# Altium PCB LAY-90818_A.brd.PcbDoc (part 4 of 6)
Units mil, origin at the board's own origin, x right, y up, seen from the top; angles counter-clockwise.
Board outline 4645.67 x 2165.35 mil, 4 copper layers (TOP, GND, POWER, BOTTOM), stack 60.45 mil thick; 414 components, 348 nets, 1441 pads, 720 vias.
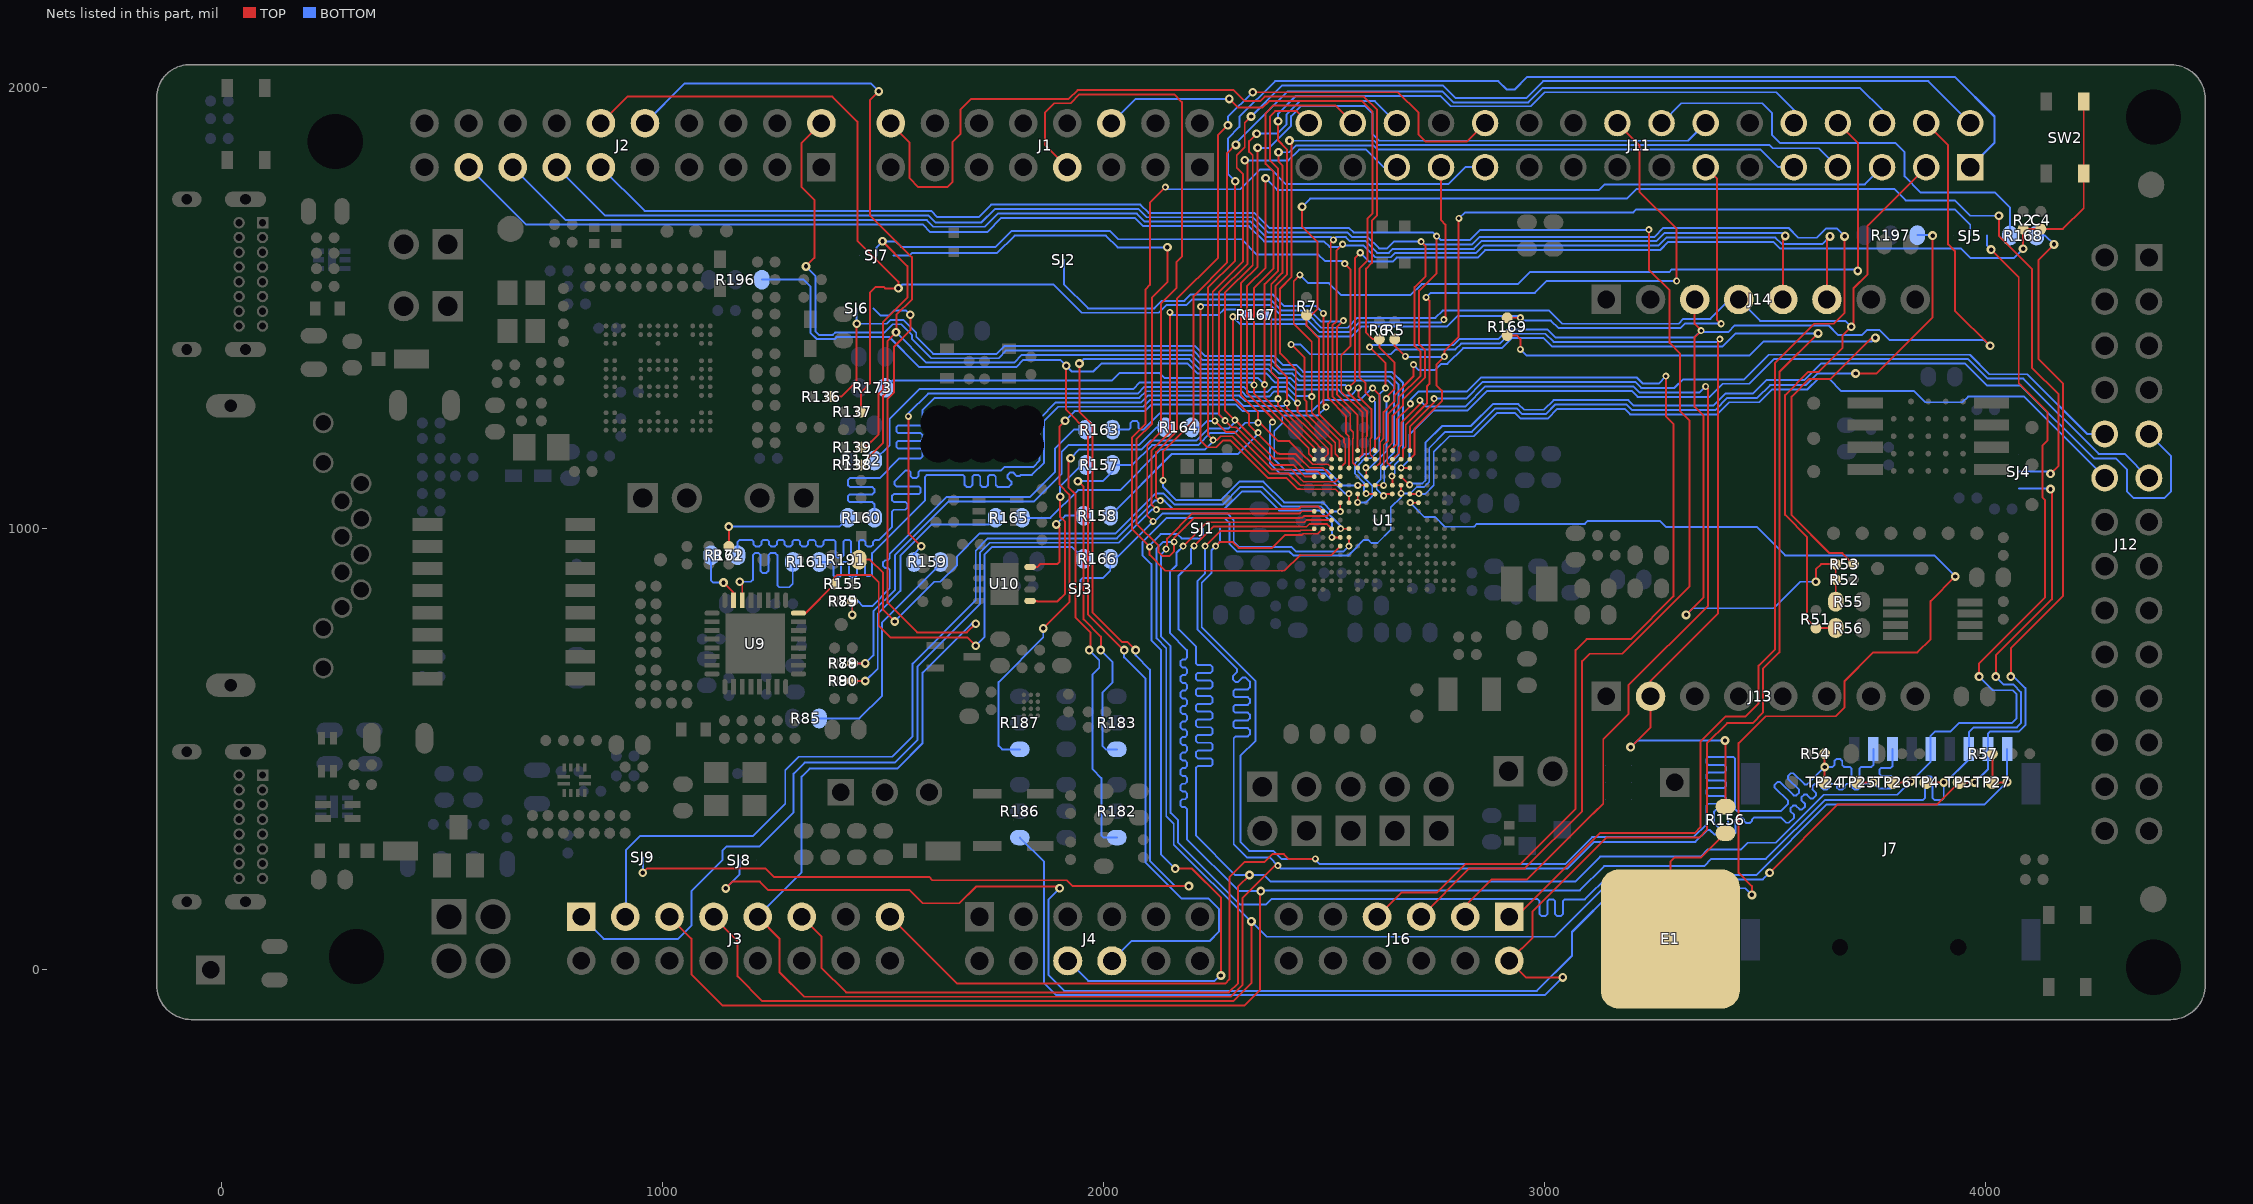
[diagram p6: the nets of this part, all layers, seen from the top]

## Via types
v1: diameter 20, hole 10, TOP to BOTTOM, 483 vias
v2: diameter 16, hole 8, TOP to BOTTOM, 215 vias
v3: diameter 18, hole 8, TOP to BOTTOM, 13 vias
v4: diameter 20, hole 10.1, TOP to BOTTOM, 9 vias

## Nets (pads, with @x,y where several pads share a name; then routed paths per layer and width w, separated by ;. In a path a pad name is that pad's centre, name@x,y a point inside that pad or via, vN(x,y) a via of type N, cw(c..) or ccw(c..) an arc to the next point about the centre after c; other vN are vias at no path point) (continued)
P0_8/FXIO_LCD_RD: J12.11 U1.C12 | length 1973.2
  TOP w4: v2(2674.37,1138.3) 2674.56,1138.11 U1.C12@2694.06,1138.11
  BOTTOM w4.4: v2(2674.37,1138.3) 2694,1157.93 2694,1214 2747.91,1267.9 2824.74,1267.9 2869.83,1313 3196.94,1313 3210.54,1299.4 3374.4,1299.4 3404,1329 3464,1329 3519.7,1384.7 3960.3,1384.7 4004.45,1340.55 4085.56,1340.55 4256.11,1170 4315.24,1170 J12.11@4370,1115.24
P0_9/FXIO_LCD_WR: J12.10 U1.A12 | length 1788.1
  TOP w4.4: U1.A12@2694.06,1177.48 2695,1178.42 2695,1232.17 2749.4,1286.58 v2(2749.4,1295.35)
  BOTTOM w4.4: v2(2749.4,1295.35) 2822.06,1295.35 2859.72,1333 3205.23,1333 3218.83,1319.4 3294.4,1319.4 3314,1339 3452.53,1339 3508.23,1394.7 3964.44,1394.7 4008.59,1350.55 4094.45,1350.55 4229.76,1215.24 J12.10@4270,1215.24
P0_10/CT0_MAT0-ARD_D9: R5.2 SJ5.1 U1.B12 | length 1947.8
  TOP w4: U1.B12@2694.06,1157.8 2705,1168.74 2705,1228.03
  TOP w4.4: R5.2@2660,1430 2660,1414.87 v2(2683.97,1390.89) ; 2705,1228.03 2766.75,1289.78 2766.75,1313.25 2755,1325 2755,1372.82 v2(2772.49,1390.31) 2772.49,1402.8 2805,1435.31 2805,1703.28 v2(2805.53,1703.8)
  BOTTOM w4.4: v2(2683.97,1390.89) 2685.34,1389.52 2771.7,1389.52 v2(2772.49,1390.31) ; v2(2805.53,1703.8) 2819.53,1717.8 3201.26,1717.8 3208.06,1724.6 3930.4,1724.6 3965,1690 SJ5.1@3965,1665
P0_11/EZH_CAMERA_HSYNC: J11.18 U1.B11 | length 1393.7
  TOP w4: U1.B11@2674.37,1157.8 2679,1162.43 2679,1180.57 2685,1186.57 2685,1205
  TOP w4.4: 2685,1205 2685,1236.32 2733.2,1284.52 2733.2,1323.2 2738.8,1328.8 2738.8,1517.6 v2(2731.4,1525) ; J11.18@3165,1920 3215,1870 3215,1764 3299.07,1679.93 v2(3299.07,1561.98)
  BOTTOM w4.4: v2(2731.4,1525) 2741.4,1535 2977.94,1535 3005.14,1562.2 3298.86,1562.2 v2(3299.07,1561.98)
P0_12/FXIO_LCD_CS: J12.9 U1.D11 | length 2251.7
  TOP w4: U1.D11@2674.37,1118.43 2674.37,1118.24 2692.68,1099.93 v2(2694,1099.93)
  BOTTOM w4: v2(2694,1099.93) 2697.07,1103 2723,1103 2730,1110
  BOTTOM w4.4: 2730,1110 2730,1195.86 2767.34,1233.2 2832.46,1233.2 2882.26,1283 2940.62,1283 2953.62,1270 2998.43,1270 3020.42,1291.99 3189.66,1291.99 3202.26,1279.4 3382.69,1279.4 3410.29,1307 3472.86,1307 3503.66,1337.8 3589.51,1337.8 3626.41,1374.7 3953.72,1374.7 4003.43,1325 4080,1325 4245,1160 4295,1160 4320,1135 4320,1085 4335,1070 4405.6,1070 4420,1084.4 4420,1165.24 J12.9@4370,1215.24
P0_13/FXIO_LCD_TE: J12.12 U1.F12 | length 1855.3
  TOP w4: U1.F12@2694.06,1079.06 2713.86,1079.06 v2(2714.74,1079.94)
  BOTTOM w4: v2(2714.74,1079.94) 2715.63,1079.06 2729.06,1079.06 2748.74,1098.74 2748.74,1174.6 2784.14,1210
  BOTTOM w4.4: 2784.14,1210 2839.14,1210 2892.14,1263 2932.33,1263 2945.33,1250 3006.71,1250 3028.7,1271.99 3181.38,1271.99 3193.97,1259.4 3390.97,1259.4 3418.57,1287 3487,1287 3516,1316 3596,1316 3620,1340 3645,1340 3672.5,1312.5 3837.5,1312.5 3863,1287 3947,1287 3960,1300 4087,1300 4270,1117 J12.12@4270,1115.24
P0_14/ADC0_B14-MC_BEMF_B: J4.6 R197.3 U1.E11 | length 3896.3
  TOP w4: v2(2674.37,1080.24) U1.E11@2674.37,1098.74
  TOP w4.4: v1(2162.5,229.67) 2200.33,229.67 2265.79,164.21 v1(2265.79,-12.8) ; v1(3705,1352.2) 3752.2,1352.2 3879.74,1479.74 v1(3879.74,1665)
  BOTTOM w4: 2560.1,944.9 2590.14,974.94 2600.06,974.94 2607.16,967.84 2620.84,967.84 2651,998 2651,1048.57 2674.37,1071.94 v2(2674.37,1080.24) 2695.24,1080.24 2710,1095 2726.31,1095 2733.11,1101.8 2733.4,1101.8 2738.2,1106.6 2738.2,1183.2 2775,1220
  BOTTOM w4.4: J4.6@1918.5,20.5 1919.5,20.5 1965,-25 2251.8,-25 2264,-12.8 v1(2265.79,-12.8) ; v1(2162.5,229.67) 2130,262.17 2130,725.58 2108.2,747.38 2108.2,919.8 2088,940 2088,969.91 2143.09,1025 2274,1025 2285,1014 2285,966.4 2302.8,948.6 2421.4,948.6 2430,940 2555.2,940 2560.1,944.9 ; 2775,1220 2835,1220 2888,1273 2936.48,1273 2949.48,1260 3002.57,1260 3024.56,1281.99 3185.52,1281.99 3198.11,1269.4 3386.83,1269.4 3414.43,1297 3482,1297 3511,1326 3591.86,1326 3618.06,1352.2 v1(3705,1352.2) ; R197.3@3845,1666 3878.74,1666 v1(3879.74,1665)
P0_15/ARD_A4: SJ8.1 U1.G13 | length 5253.6
  TOP w4: v2(2695.24,1059.37) U1.G13@2713.74,1059.37
  TOP w4.4: v1(1143,184.8) 1158.2,200 1220.71,200 1239.98,180.73 1560.27,180.73 1590,151 1673,151 1711,189 1896,189 v1(1900,185) ; v1(3470,170) 3470,190 3440,220 3440,514.14 3500.85,575 3660,575 3680,595 3680,655 3745,720 3845,720 3875,750 3875,836 v1(3931,892)
  BOTTOM w4: v2(2695.24,1059.37) 2695.24,1058.76 2727.13,1026.87 2751.97,1026.87 2773.84,1005 2840,1005
  BOTTOM w4.4: v1(1143,184.8) 1174,215.8 SJ8.1@1174,249 ; v1(1900,185) 1875,160 1875,-12 1910.5,-47.5 2982.5,-47.5 3062,32 3062,85.86 3161.14,185 3455,185 v1(3470,170) ; 2840,1005 2846.2,1011.2 3091.2,1011.2 3098.2,1018.2 3260.94,1018.2 3274.57,1004.57 3480.43,1004.57 3545,940 3883,940 v1(3931,892)
P0_16/PMOD_FC0_SPI_MOSI: J16.3 U1.B10 | length 2322.4
  TOP w4: U1.B10@2654.69,1157.8 2670,1173.11 2670,1185 2675,1190
  TOP w4.4: 2675,1190 2675,1240.46 2717,1282.46 v2(2717,1291.23) ; J16.3@2820,120.5 2820,145 2880,205 2960,205 3110,355 3110.74,355 3132.87,377.13 3132.87,522.87 3190,580 3190,645 3370.4,825.4 3370.4,1317.4 v2(3365,1322.8)
  BOTTOM w4.4: v2(2717,1291.23) 2730.33,1277.9 2820.59,1277.9 2865.69,1323 3201.09,1323 3214.68,1309.4 3351.6,1309.4 v2(3365,1322.8)
P0_17/PMOD_FC0_SPI_CLK: J16.7 U1.A10 | length 2434.8
  TOP w4: U1.A10@2654.69,1177.48 2654.69,1181.95 2665,1192.26
  TOP w4.4: J16.7@2620,120.5 2648.28,148.78 2648.78,148.78 2675,175 2755,175 2820,240 2945,240 3070,365 3070,725 3095,750 3195,750 3291.8,846.8 3291.8,1238.2 3275,1255 v2(3275,1346.14) ; 2665,1192.26 2665,1248 2695.34,1278.34 v2(2695.34,1283.71)
  BOTTOM w4.4: v2(2695.34,1283.71) 2695.34,1292.48 2714.4,1311.55 2824.12,1311.55 2855.57,1343 3209.37,1343 3222.97,1329.4 3258.26,1329.4 v2(3275,1346.14)
P0_18/PMOD_FC0_SPI_MISO: J2.11 J16.5 U1.C10 | length 5030.8
  TOP w4: U1.C10@2654.69,1138.11 2643,1149.8 2643,1182.99 2655,1194.99 2655,1235
  TOP w4.4: 2655,1235 2655,1256.52 2679.14,1280.65 2679.14,1293.85 2728.8,1343.51 2728.8,1405.34 2715.2,1418.94 2715.2,1540.2 2755,1580 v2(2755,1663.8) ; J16.5@2720,120.5 2829.5,230 2955,230 3085,360 3085,700 3101.72,716.72 3175.86,716.72 3328.2,869.05 3328.2,1245.94 3306.8,1267.34 3306.8,1398.2 3283.34,1421.66 3283.34,1540.66 3236.4,1587.6 v2(3236.4,1678.4)
  BOTTOM w4.4: J2.11@860,1820 959,1721 1609,1721 1623.2,1706.8 1716.8,1706.8 1745,1735 2083.43,1735 2101.83,1716.6 2341.82,1716.6 2376.37,1682.06 2556.84,1682.06 2566.69,1672.2 2746.6,1672.2 v2(2755,1663.8) 2763.8,1655 2831.2,1655 2854,1677.8 3235.8,1677.8 v2(3236.4,1678.4)
P0_19/PMOD_FC0_SPI_CS: J2.13 J16.1 U1.C9 | length 5683.9
  TOP w4: U1.C9@2635,1138.11 2635,1190 2645,1200
  TOP w4.4: 2645,1200 2645,1260.66 2669.14,1284.8 2669.14,1297.99 2718.8,1347.66 2718.8,1401.2 2705.2,1414.8 2705.2,1548.15 2730,1572.94 2730,1641.2 v2(2720,1651.2) ; J16.1@2920,120.5 2935.5,120.5 3125,310 3340,310 3353.2,323.2 3353.2,517.2 3410.57,574.57 3455.43,574.57 3485,604.14 3485,690 3522.46,727.46 3522.46,1376.4 3611.06,1465 3655,1465 3680,1490 v1(3680,1663)
  BOTTOM w4.4: J2.13@760,1820 869.82,1710.18 1603.1,1710.18 1618.29,1695 1723,1695 1753,1725 2079.28,1725 2097.68,1706.6 2337.68,1706.6 2372.22,1672.06 2552.69,1672.06 2562.55,1662.2 2598.06,1662.2 2624.46,1635.8 2642.66,1635.8 2658.06,1651.2 v2(2720,1651.2) 2720,1650.4 2725.4,1645 2835.34,1645 2852.54,1662.2 3249.09,1662.2 3269.4,1682.51 3552.91,1682.51 3575.41,1660 3617,1660 3638.2,1681.2 3661.8,1681.2 v1(3680,1663)
P0_20/PMOD_INT: J16.2 R186.3 U1.C8 | length 4805.9
  TOP w4: U1.C8@2615.31,1138.11 2626.99,1149.79 2626.99,1186.99 2627,1197 2635,1205
  TOP w4.4: 2635,1205 2635,1264.8 2659.14,1288.94 2659.14,1302.14 2702.6,1345.6 v2(2702.6,1372.27) ; v1(3041,-17) 2957.5,-17 J16.2@2920,20.5 2948.28,48.78 2948.78,48.78 2972,72 2972,132 3140,300 3350,300 3367.77,317.77 3367.77,513.77 3413.64,559.64 3471.36,559.64 3495,583.29 3495,682.5 3532.46,719.96 3532.46,1355.66 v1(3620,1443.2)
  BOTTOM w4.4: R186.3@1810,300 1865,245 1865,-30 1892.5,-57.5 3000.5,-57.5 v1(3041,-17) ; v2(2702.6,1372.27) 2714.87,1360 2751.06,1360 2765.17,1374.11 2779.2,1374.11 2815.09,1410 2902.68,1410 2925.08,1432.4 2997.6,1432.4 3016.2,1413.8 3403.8,1413.8 3433.2,1443.2 v1(3620,1443.2)
P0_21/TSI0_CH16: R187.3 U1.A8 | length 1761.3
  TOP w4: U1.A8@2615.31,1177.48 2615.31,1200.31 2620,1205
  TOP w4.4: v1(1863,774.2) 1922.5,833.7 1922.5,1077.44 1900,1099.94 1900,1232.5 v1(1912.5,1245) ; v2(2610,1319) 2625,1304 2625,1210 2620,1205
  BOTTOM w4.4: R187.3@1810,500 1770,500 1762,508 1762,652.65 1863,753.65 v1(1863,774.2) ; v1(1912.5,1245) 1934.3,1266.8 2093.51,1266.8 2108.71,1282 2299.71,1282 2314.37,1267.35 2472.86,1267.35 2497.5,1291.99 2580.86,1291.99 2607.88,1319 v2(2610,1319)
P0_22/ADC0_A14-MC_BEMF_C: J4.8 R196.3 U1.B8 | length 3475.9
  TOP w4: 2607,1207 2604.61,1204.61 2604.61,1173.05 2604.65,1168.46 U1.B8@2615.31,1157.8
  TOP w4.4: v1(1915,1370) 1915,1270 1964.42,1220.58 1964.42,806.32 2045.74,725 v1(2046.52,725) ; v2(2577.6,1319.42) 2577.6,1300.69 2607,1271.29 2607,1207
  BOTTOM w4.4: R196.3@1225,1565 1320,1565 1335,1550 1335,1445 1350,1430 1390,1430 1395,1435 1514.08,1435 1582.28,1366.8 1801.8,1366.8 1818.2,1383.2 1901.8,1383.2 v1(1915,1370) 1928.2,1356.8 1976.8,1356.8 1994.68,1374.68 2190.37,1374.68 2212.64,1352.4 2368.86,1352.4 2389.48,1331.78 2419.84,1331.78 2435.68,1315.93 2532.07,1315.93 2546.01,1301.99 2560.16,1301.99 v2(2577.6,1319.42) ; J4.8@2018.5,20.5 2063,65 2240,65 2262,87 2262,137 2237,162 2176.15,162 2095,243.14 2095,660 2046.52,708.48 v1(2046.52,725)
P0_23/ARD_A5: C4.1 R2.2 SJ9.1 SW2.3 SW2.4 U1.B7 | length 5743.2
  TOP w4: U1.B7@2595.63,1157.8 2595.63,1208.63 2597,1210
  TOP w4.4: v1(955,220) 965,230 1233.14,230 1252.41,210.73 1604.27,210.73 1611.8,203.2 1916.8,203.2 1930,190 v1(2193.26,190) ; v1(1945,1375) 1945,1265 1974.42,1235.58 1974.42,810.46 2041.68,743.2 2054.32,743.2 v1(2072.51,725) ; v2(2581.8,1626) 2570,1614.2 2570,1335 2555,1320 v2(2555,1319.73) 2555,1309.14 2597,1267.14 2597,1210 ; v1(4085,1635) R2.2@4085,1680 C4.1@4125,1680 4175,1680 4222.32,1727.32 SW2.3@4222.32,1805.67 SW2.4@4222.32,1969.06
  BOTTOM w4.4: v1(955,220) SJ9.1@955,255 ; v1(1945,1375) 1954.68,1384.68 2194.51,1384.68 2216.79,1362.4 2373,1362.4 2393.62,1341.78 2423.98,1341.78 2439.83,1325.93 2548.8,1325.93 v2(2555,1319.73) ; v1(2072.51,725) 2072.51,713.14 2105,680.66 2105,247.29 2162.29,190 v1(2193.26,190) ; v2(2581.8,1626) 2602,1605.8 2655.09,1605.8 2664.28,1615 2847.77,1615 2864.97,1632.2 3261.52,1632.2 3279.9,1650.58 3518.84,1650.58 3533.32,1636.11 3943.89,1636.11 3966,1614 4064,1614 v1(4085,1635)
P0_24/FC1_SPI_SDO-ARD_D11: R139.2 SJ7.1 U1.B6 | length 2158.2
  TOP w4: U1.B6@2575.94,1157.8 2587,1168.86 2587,1210
  TOP w4.4: R139.2@1450,1185 1460,1185 1489.7,1214.7 1489.7,1306.41 1500,1316.71 1500,1469.16 1555,1524.16 1555,1595.51 v1(1498.52,1651.98) ; v2(2546.63,1601.2) 2560,1587.83 2560,1415 2538.8,1393.8 2538.8,1311.2 2587,1263 2587,1210
  BOTTOM w4.4: SJ7.1@1485,1620 1485,1638.46 v1(1498.52,1651.98) 1528.01,1651.98 1540.6,1639.4 1755.25,1639.4 1790.86,1675 2015,1675 2033.4,1656.6 2312.79,1656.6 2347.33,1622.06 2487.05,1622.06 2501.71,1607.4 2540.43,1607.4 v2(2546.63,1601.2)
P0_25/FCI_SPI_SCK-ARD_D13: J2.12 R137.2 U1.A6 | length 2790
  TOP w4.4: J2.12@860,1920 920,1980 1385,1980 1441.4,1923.6 1441.4,1653.6 1534.55,1560.45 v1(1534.55,1545.4) 1504.6,1545.4 1501.4,1548.6 1482.86,1548.6 1470,1535.74 1470,1330 1450,1310 R137.2@1450,1265 ; v2(2543.8,1472.13) 2528.8,1457.13 2528.8,1305.18 2575.94,1258.04 U1.A6@2575.94,1177.48
  BOTTOM w4.4: v1(1534.55,1545.4) 1542.75,1553.6 1886.4,1553.6 1950,1490 2125,1490 2142.08,1507.08 2187.08,1507.08 2200,1520 2379.14,1520 2404.14,1495 2468.76,1495 2493.76,1470 2541.67,1470 v2(2543.8,1472.13)
P0_26/FC1_SPI_SDI-ARD_D12: J2.10 R138.2 U1.F10 | length 3004.8
  TOP w4: v2(2635,1075) 2639.06,1079.06 U1.F10@2654.69,1079.06
  TOP w4.4: R138.2@1450,1145 1499.7,1194.7 1499.7,1302.27 1510,1312.57 1510,1426.5 v1(1529.24,1445.74) 1530,1446.5 1530,1485.02 1565,1520.02 1565,1616.06 1470,1711.06 1470,1971.8 v1(1490,1991.8)
  BOTTOM w4: v2(2635,1075) 2634,1075 2619,1090 2619,1103 2628.23,1112.23 2628.23,1143.23 2658.8,1173.8
  BOTTOM w4.4: J2.10@960,1920 1050,2010 1471.8,2010 v1(1490,1991.8) ; v1(1529.24,1445.74) 1598.18,1376.8 1796.8,1376.8 1814.68,1394.68 2198.65,1394.68 2220.93,1372.4 2377.14,1372.4 2397.76,1351.78 2428.12,1351.78 2443.97,1335.93 2645.31,1335.93 2658.8,1322.43 2658.8,1173.8
P0_27/FC1_SPI_PCS-ARD_D10: R136.2 SJ6.1 U1.E10 | length 1804.9
  TOP w4: v2(2653.47,1119.46) 2654.69,1118.24 U1.E10@2654.69,1098.74
  TOP w4.4: R136.2@1380,1300 1405,1300 1440.05,1335.05 v1(1440.05,1465)
  BOTTOM w4: v2(2653.47,1119.46) 2660,1125.98 2660,1145 2678.8,1163.8
  BOTTOM w4.4: SJ6.1@1440,1500 v1(1440.05,1465) v1(1440.05,1465) 1508.61,1465 1517.56,1473.94 1546.06,1473.94 1575,1445 1575,1435.07 1613.27,1396.8 1757.66,1396.8 1775.54,1414.68 2206.94,1414.68 2229.22,1392.4 2385.43,1392.4 2406.05,1371.78 2436.41,1371.78 2452.26,1355.93 2653.59,1355.93 2678.8,1330.72 2678.8,1163.8
P0_28/ARD_D8: J2.2 U1.E8 | length 2193.9
  TOP w4: U1.E8@2615.31,1098.74 v2(2635,1098.74)
  TOP w4.4: v1(1325,1595) 1344.2,1614.2 1344.2,1745.8 1315,1775 1315,1875 J2.2@1360,1920
  BOTTOM w4: v2(2635,1098.74) 2636.23,1099.97 2636.23,1134.91 2668.8,1167.49
  BOTTOM w4.4: v1(1325,1595) 1347.07,1572.93 1347.07,1447.07 1354.14,1440 1385.86,1440 1390.86,1445 1502.76,1445 1521.7,1463.94 1541.06,1463.94 1565,1440 1565,1430.92 1609.12,1386.8 1761.8,1386.8 1779.68,1404.68 2202.8,1404.68 2225.07,1382.4 2381.29,1382.4 2401.91,1361.78 2432.27,1361.78 2448.11,1345.93 2649.45,1345.93 2668.8,1326.58 2668.8,1167.49
P0_29/ARD_D2: J1.6 U1.F8 | length 1587.4
  TOP w4: v2(2595,1080) 2596,1080 2596.94,1079.06 U1.F8@2615.31,1079.06
  TOP w4.4: v1(2285,1975) 2305,1955 2360,1955 2375,1970 2585.86,1970 2610,1945.86 2610,1715.22 2598,1703.22 2598,1608 2580,1590 2580,1344 2593.8,1330.2 2593.8,1309.01 v2(2608.8,1294.01)
  BOTTOM w4: v2(2595,1080) 2590.13,1084.87 2590.13,1104.87 2570,1125 2570,1148.84 2590.58,1169.42 2599.42,1169.42 2615,1185
  BOTTOM w4.4: J1.6@2017.5,1920 2072.5,1975 v1(2285,1975) ; v2(2608.8,1294.01) 2615,1287.81 2615,1185
P0_30/ARD_D4: SJ2.1 U1.E7 | length 1356.6
  TOP w4: v2(2576.13,1098.74) U1.E7@2595.63,1098.74
  TOP w4.4: v2(2498.02,1488.65) 2498.8,1487.88 2498.8,1280.19 2503.2,1275.79 v2(2504.21,1275.79)
  BOTTOM w4.4: SJ2.1@1910,1610 1910,1555 1965,1500 2115,1500 2132.08,1517.08 2182.93,1517.08 2196.86,1531 2384,1531 2410,1505 2481.67,1505 v2(2498.02,1488.65) ; v2(2504.21,1275.79) 2485.77,1257.35 2409.4,1257.35 2405,1252.95 2405,1239.61 2386.8,1221.41 2386.8,1158.2 2411.6,1133.4 2506.48,1133.4 2541.14,1098.74 v2(2576.13,1098.74)
P0_31/ARD_D7: J1.16 R6.2 U1.D7 | length 2324.5
  TOP w4: v2(2594.44,1138.56) 2595.63,1137.37 U1.D7@2595.63,1118.43
  TOP w4.4: J1.16@1517.5,1920 1517.5,1917.5 1560,1875 1560,1795 1580,1775 1645,1775 1657.5,1787.5 1657.5,1877.5 1675,1895 1675,1950 1700,1975 1920.86,1975 1940.86,1995 2295,1995 2320,1970 2355,1970 2365,1980 2590,1980 2620,1950 2620,1711.08 2608,1699.08 2608,1603 2595,1590 2595,1445 2610,1430 R6.2@2625,1430 2625,1412 2660,1377 2660,1317.14 2641.29,1298.43 v2(2641.29,1295)
  BOTTOM w4: v2(2594.44,1138.56) 2603.56,1138.56
  BOTTOM w4.4: 2603.56,1138.56 2641.29,1176.29 v2(2641.29,1295)
P1_0/FC3_I2C_SDA: J2.17 J14.6 U1.C6 | length 3921.8
  TOP w4: 2565.94,1219.06 2565.94,1205.54 2565,1204.6 2565,1150 2575.94,1139.06 U1.C6@2575.94,1138.11
  TOP w4.4: v2(2541.95,1645.37) 2527.6,1631.01 2527.6,1470.07 2518.8,1461.27 2518.8,1301.04 2559.22,1260.62 2559.22,1225.78 2565.94,1219.06 ; J14.6@3640.04,1520.11 3640.04,1656.04 v1(3647,1663)
  BOTTOM w4.4: J2.17@560,1820 689.82,1690.18 1589.82,1690.18 1607,1673 1736.17,1673 1768.17,1705 2071,1705 2089.4,1686.6 2329.39,1686.6 2363.94,1652.06 2499.48,1652.06 2512.37,1639.17 2535.75,1639.17 v2(2541.95,1645.37) 2545.12,1642.2 2589.77,1642.2 2616.17,1615.8 2650.94,1615.8 2660.14,1625 2843.63,1625 2860.83,1642.2 3257.38,1642.2 3275.76,1660.58 3523.27,1660.58 3537.75,1646.11 3630.11,1646.11 v1(3647,1663)
P1_1/FC3_I2C_SCL: J2.15 J14.5 U1.C5 | length 3705.4
  TOP w4: 2555.94,1210 2555.94,1205.86 2556.26,1205.54 U1.C5@2556.26,1138.11
  TOP w4.4: v2(2521.1,1655.37) 2515,1649.27 2515,1471.62 2508.8,1465.41 2508.8,1296.89 2549.22,1256.48 2549.22,1216.72 2555.94,1210 ; J14.5@3540.04,1520.11 3540.04,1658.98 v1(3545.37,1664.31)
  BOTTOM w4.4: J2.15@660,1820 779.82,1700.18 1598.96,1700.18 1614.14,1685 1730.03,1685 1760.03,1715 2075.14,1715 2093.54,1696.6 2333.54,1696.6 2368.08,1662.06 2514.41,1662.06 v2(2521.1,1655.37) 2527.3,1661.57 2549.04,1661.57 2558.41,1652.2 2593.92,1652.2 2620.32,1625.8 2646.8,1625.8 2656,1635 2839.49,1635 2856.68,1652.2 3253.23,1652.2 3271.62,1670.58 3539.09,1670.58 v1(3545.37,1664.31)
P1_2/CT1_MAT0-ARD_D6: R7.2 SJ4.1 U1.C4 | length 3010.5
  TOP w4: U1.C4@2536.57,1138.11 2548.07,1149.61 2548.07,1191.94 2545,1195.01 2545,1205 2540,1210
  TOP w4.4: v1(2450,1730.26) 2450,1685 2485.38,1649.62 2485.38,1498.92 2471.46,1485 R7.2@2460,1485 2460,1460 2488.01,1431.99 2488.01,1261.13 2539.14,1210 2540,1210 ; v1(4030,1710) 4030,1664.26 4105,1589.26 4105,1365 4165.2,1304.8 4165.2,1143.2 v1(4147,1125)
  BOTTOM w4.4: v1(2450,1730.26) 2468.34,1748.6 3186.51,1748.6 3208.91,1771 3792.29,1771 3818.29,1745 3930,1745 3965,1710 v1(4030,1710) ; SJ4.1@4075,1130 4142,1130 v1(4147,1125)
P1_3/ME_RESET: J13.2 R156.2 U1.B4 | length 2696.7
  TOP w4: 2510.07,1210 2525.07,1195 2525.07,1169.93 2536.57,1158.43 U1.B4@2536.57,1157.8
  TOP w4.4: v2(2425.19,1417.98) 2426.02,1417.98 2455.61,1388.39 2455.61,1293.02 2460,1288.63 2460,1260.07 2510.07,1210 ; v1(3195,505) 3240.04,550.04 J13.2@3240.04,620.11 3240.04,655.04 3393,808 3393,1425.91 v2(3397.09,1430) ; v1(3409,520) 3410,519 R156.2@3410,370
  BOTTOM w4.4: v2(2425.19,1417.98) 2446.78,1417.98 2468.83,1395.93 2650.93,1395.93 2662.09,1407.09 2797.58,1407.09 2810.49,1420 2898.53,1420 2920.93,1442.4 3001.74,1442.4 3020.34,1423.8 3390.89,1423.8 v2(3397.09,1430) ; v1(3195,505) 3210,520 v1(3409,520)
P1_3/TOUCH_PAD: E1.1 R156.1 | length 326.9
  TOP w4.4: E1.1@3285,70 3285,245 3295,255 3355,255 R156.1@3410,310
P1_4/ENET_TXCLK: R85.2 R159.1 | length 522.2
  BOTTOM w4.4: R85.2@1355,570 1446,570 1497.7,621.7 1497.7,787.7 1630,920 R159.1@1630,925
P1_4/EZH_LCD_D0_CAMERA_D0: J11.8 R159.2 U1.A4 | length 3425.6
  TOP w4: 2525,1210 2535,1200 2535,1179.05 U1.A4@2536.57,1177.48
  TOP w4.4: v2(1557,1255) 1557,990 v1(1586.5,960.5) ; v2(2445,1575.86) 2431.07,1561.93 2431.07,1465.3 2471.81,1424.55 v2(2471.81,1299.73) 2471.81,1263.19 2525,1210 ; J11.8@3665,1920 3710,1875 v1(3710,1585)
  BOTTOM w4.4: v2(1557,1255) 1556.6,1255.4 1556.6,1261.63 1601.77,1306.8 2076.94,1306.8 2092.14,1322 2318,1322 2330,1310 2370.86,1310 2382.06,1321.2 2416.27,1321.2 2436.27,1301.2 2470.34,1301.2 v2(2471.81,1299.73) ; R159.2@1570,925 1570,944 v1(1586.5,960.5) ; v2(2445,1575.86) 2463.46,1557.4 2510.95,1557.4 2538.46,1529.89 2695.71,1529.89 2720.82,1555 2939.26,1555 2966.46,1582.2 3282.23,1582.2 3288.22,1588.18 3706.82,1588.18 v1(3710,1585)
P1_5/ENET_TXEN: R71.1 R160.1 | length 323.3
  TOP w4.4: R71.1@1150,960 v1(1150,1005)
  BOTTOM w4.4: v1(1150,1005) 1400,1005 R160.1@1420,1025
P1_5/EZH_LCD_D1_CAMERA_D1: J11.7 R160.2 U1.B3 | length 3704.6
  TOP w4: 2495,1210 2516.89,1188.11 U1.B3@2516.89,1157.8
  TOP w4.4: v1(2421.43,1880.33) 2425.5,1876.27 2425.5,1865.5 2425.5,1570.5 2400,1545 2400,1398 2435.6,1362.4 2435.6,1289.4 v2(2440,1285) 2440,1265 2495,1210
  BOTTOM w4.4: R160.2@1480,1025 1480,1056.35 1475.6,1060.75 1424.4,1060.75 1420,1065.15 1420,1073.95 1424.4,1078.35 1475.6,1078.35 1480,1082.75 1480,1090 1475,1095 1424.4,1095 1420,1099.4 1420,1110.61 1424.39,1115 1492,1115 1537,1160 1585.16,1160 1589.56,1164.4 1589.56,1177.54 1585.16,1181.94 1534.4,1181.94 1530,1186.34 1530,1195.14 1534.4,1199.54 1585.16,1199.54 1589.56,1203.94 1589.56,1212.74 1585.16,1217.14 1534.4,1217.14 1530,1221.54 1530,1230.34 1534.4,1234.74 1585.16,1234.74 1589.56,1239.14 1589.56,1269.56 1616.8,1296.8 2081.08,1296.8 2096.28,1312 2313,1312 2325,1300 2375,1300 2386.2,1311.2 2412.13,1311.2 2438.33,1285 v2(2440,1285) ; v1(2421.43,1880.33) 2428.17,1880.33 2428.5,1880 2613.12,1880 2623.12,1870 3510,1870 3517,1863 3622,1863 J11.7@3665,1820
P1_6/ENET_TXD0: R161.1 U9.22 | length 429.2
  TOP w4.4: v1(1175,880) 1180.45,874.55 U9.22@1180.45,838.01
  BOTTOM w4.4: v1(1175,880) 1200,880 1204.4,884.4 1204.4,940.6 1208.8,945 1217.6,945 1222,940.6 1222,904.4 1226.4,900 1235.2,900 1239.6,904.4 1239.6,940.6 1244,945 1255.6,945 1260,940.6 1260,871.95 1264.4,867.55 1287.55,867.55 1295,875 R161.1@1295,925
P1_6/EZH_LCD_D2_CAMERA_D2: J11.10 R161.2 U1.B2 | length 3751
  TOP w4: 2485,1205 2508.7,1181.3 2508.7,1169.3 U1.B2@2497.2,1157.8
  TOP w4.4: v1(2395.46,1924.11) 2395.46,1880.57 2415.5,1860.53 2415.5,1576.36 2390,1550.86 2390,1370 2415.42,1344.58 v2(2415.42,1285) 2415.42,1274.58 2485,1205
  BOTTOM w4.4: R161.2@1355,925 1382.91,925 1387.31,920.6 1387.31,894.4 1391.71,890 1400.51,890 1404.91,894.4 1404.91,920.6 1409.31,925 1418.11,925 1422.51,920.6 1422.51,894.4 1426.91,890 1436.65,890 1441.05,894.4 1441.05,915.6 1445.45,920 1454.25,920 1458.65,915.6 1458.65,897.6 1463.05,893.2 1470.6,893.2 1475,897.6 1475,945 1595,1065 1595,1118.1 1599.4,1122.5 1680.55,1122.5 1684.94,1118.1 1684.94,1099.4 1689.35,1095 1698.14,1095 1702.55,1099.4 1702.55,1118.1 1706.94,1122.5 1715.74,1122.5 1720.14,1118.1 1720.14,1099.4 1724.55,1095 1733.35,1095 1737.74,1099.4 1737.74,1118.1 1742.14,1122.5 1750.94,1122.5 1755.35,1118.1 1755.35,1099.4 1759.74,1095 1785,1095 1790.77,1100.77 1790.77,1106.99 1781.99,1115.77 1781.99,1121.99 1788.22,1128.22 1794.44,1128.22 1803.22,1119.44 1809.44,1119.44 1812.5,1122.5 1837.5,1122.5 1865,1150 1865,1245 1896.8,1276.8 2089.37,1276.8 2104.57,1292 2303.86,1292 2317.06,1278.8 2409.22,1278.8 v2(2415.42,1285) ; v1(2395.46,1924.11) 2395.46,1941.46 2435,1981 2764,1981 2786.8,1958.2 2968.2,1958.2 3000,1990 3525,1990 3565,1950 J11.10@3565,1920
P1_7/ENET_TXD1: R162.1 U9.23 | length 136.9
  TOP w4.4: v1(1138.07,878.07) 1160.75,855.4 U9.23@1160.75,838.01
  BOTTOM w4.4: R162.1@1110,940 1110,882.47 1114.4,878.07 v1(1138.07,878.07)
P1_7/EZH_LCD_D3_CAMERA_D3: J11.9 R162.2 U1.A2 | length 3902.4
  TOP w4: 2475.07,1200.79 2497.2,1178.66 U1.A2@2497.2,1177.48
  TOP w4.4: v1(2396.4,1853.89) 2396.4,1833.6 2405.5,1824.5 2405.5,1580.5 2380,1555 2380,1355 2395.82,1339.18 v2(2395.82,1295) 2395.82,1280.04 2475.07,1200.79
  BOTTOM w4.4: R162.2@1170,940 1170,970.6 1174.4,975 1201.93,975 1206.33,970.6 1206.33,964.4 1210.73,960 1219.53,960 1223.93,964.4 1223.93,970.6 1228.33,975 1237.13,975 1241.53,970.6 1241.53,964.4 1245.93,960 1254.73,960 1259.13,964.4 1259.13,970.6 1263.53,975 1272.33,975 1276.73,970.6 1276.73,964.4 1281.13,960 1289.93,960 1294.33,964.4 1294.33,970.6 1298.73,975 1307.53,975 1311.93,970.6 1311.93,964.4 1316.33,960 1325.13,960 1329.53,964.4 1329.53,970.6 1333.93,975 1342.73,975 1347.13,970.6 1347.13,964.4 1351.53,960 1360.33,960 1364.73,964.4 1364.73,970.6 1369.13,975 1387.91,975 1392.31,970.6 1392.31,939.4 1396.71,935 1405.51,935 1409.91,939.4 1409.91,970.6 1414.31,975 1423.11,975 1427.51,970.6 1427.51,939.4 1431.91,935 1440.71,935 1445.11,939.4 1445.11,970.6 1449.51,975 1455.24,975 1459.64,970.6 1459.64,964.4 1464.05,960 1472.85,960 1477.24,964.4 1477.24,970.6 1481.64,975 1490.86,975 1520,1004.14 1520,1038.9 1524.4,1043.3 1550.6,1043.3 1555,1047.7 1555,1056.5 1550.6,1060.9 1524.4,1060.9 1520,1065.3 1520,1074.49 1524.4,1078.89 1580.6,1078.89 1585,1083.29 1585,1092.09 1580.6,1096.49 1529.8,1096.49 1525.4,1100.89 1525.4,1107.11 1550.79,1132.5 1557.9,1132.5 1562.31,1128.1 1562.31,1119.4 1566.7,1115 1575.51,1115 1579.9,1119.4 1579.9,1128.1 1584.31,1132.5 1767.5,1132.5 1775,1140 1840,1140 1855,1155 1855,1250 1891.8,1286.8 2085.22,1286.8 2100.43,1302 2308,1302 2320,1290 2390.82,1290 v2(2395.82,1295) ; v1(2396.4,1853.89) 2420.89,1853.89 2436.6,1869.6 2611.64,1869.6 2621.24,1860 3490,1860 3530,1820 J11.9@3565,1820
P1_8/FC4_P0_UART_RXD_MCULINK: J11.32 R173.2 U1.A1 | length 1813.1
  TOP w4.4: J11.32@2465,1920 2438,1947 2389,1947 2377.26,1935.26 2377.26,1834.74 2395.5,1816.5 2395.5,1585.5 2364.99,1554.98 v2(2365,1327.05) 2365,1296.71 2477.52,1184.19 U1.A1@2477.52,1177.48
  BOTTOM w4.4: R173.2@1505,1320 1521.8,1336.8 2019.26,1336.8 2035.66,1353.2 2126.8,1353.2 2137.72,1342.28 2326.33,1342.28 2326.45,1342.4 2349.65,1342.4 v2(2365,1327.05)
P1_9/FC4_P1_UART_TXD_MCULINK: J11.30 R172.2 U1.B1 | length 2060.6
  TOP w4.4: U1.B1@2477.52,1157.8 2465,1170.32 2465,1182.57 2341.2,1306.37 v2(2341.2,1326.2) 2341.2,1546.2 2385.5,1590.5 2385.5,1809.5 2367.26,1827.74 2367.26,1942.26 2385,1960 2525,1960 J11.30@2565,1920
  BOTTOM w4.4: R172.2@1480,1155 1515,1190 1515,1250 1581.8,1316.8 2066.8,1316.8 2082,1332 2335.4,1332 v2(2341.2,1326.2)
P1_10/CAN0_TXD: R157.1 U10.1 | length 414.4
  TOP w4.4: U10.1@1833.07,836.61 1848.39,836.61 1849.73,835.27 1895.27,835.27 1912.5,852.5 1912.5,1015.74 1901.4,1026.84 v1(1901.4,1072.8)
  BOTTOM w4.4: v1(1901.4,1072.8) 1901.4,1096.4 1950,1145 R157.1@1960,1145
P1_10/EZH_LCD_D6_CAMERA_D6: J11.14 R157.2 R183.3 U1.C3 | length 3159.3
  TOP w4: 2445,1175 2473.7,1146.3 2508.7,1146.3 U1.C3@2516.89,1138.11
  TOP w4.4: v1(1941.53,1108) 1954.42,1095.11 1954.42,794.72 1993.5,755.64 v1(1993.5,725) ; v1(2349.06,1864) 2349.06,1859.14 2349.1,1859.1 2349.1,1594.1 2311.4,1556.4 2311.4,1303.6 2350.47,1264.53 v2(2350.47,1240.58) 2354.42,1240.58 2396.17,1198.83 2421.17,1198.83 2445,1175
  BOTTOM w4.4: v1(1941.53,1108) 1998,1108 2020,1130 R157.2@2020,1145 2065,1145 2110,1190 2214.18,1190 2241.58,1217.4 2297.98,1217.4 2321.15,1240.58 v2(2350.47,1240.58) ; v1(1993.5,725) 2020,698.5 2020,651.43 1997.5,628.93 1997.5,507.5 2005,500 R183.3@2030,500 ; v1(2349.06,1864) 2375.24,1864 2425,1913.76 2425,1935.86 2448.14,1959 2592.2,1959 2610,1941.2 2610,1895 2625,1880 3325,1880 J11.14@3365,1920
P1_11/CAN0_RXD: R158.1 U10.4 | length 230.8
  TOP w4.4: U10.4@1833.07,913.39 1849.39,913.39 1856.28,920.28 1895.28,920.28 1900.2,925.2 1900.2,1002.3 v1(1892.5,1010)
  BOTTOM w4.4: v1(1892.5,1010) 1912.5,1030 R158.1@1955,1030
P1_11/EZH_LCD_D7_CAMERA_D7: J11.13 R158.2 R169.2 U1.D3 | length 2473.8
  TOP w4: 2445,1160 2466.7,1138.3 2497.02,1138.3 U1.D3@2516.89,1118.43
  TOP w4.4: v2(2293.2,1480.95) 2293.2,1296.8 2330,1260 2330,1235 2346.97,1218.03 v2(2350.47,1218.03) 2350.47,1214.53 2394.57,1170.43 2398.06,1170.43 2398.49,1170 2435,1170 2445,1160 ; R169.2@2915,1478.6 v2(2945,1478.6) ; J11.13@3365,1820 3390.34,1794.66 3390.34,1474.66 v2(3400,1465)
  BOTTOM w4.4: R158.2@2015,1030 2155,1170 2305.17,1170 2350.47,1215.3 v2(2350.47,1218.03) ; v2(2293.2,1480.95) 2309.97,1464.18 2457.15,1464.18 2485.4,1435.93 2561.46,1435.93 2583.86,1458.33 2778.11,1458.33 2802.18,1482.4 2941.2,1482.4 v2(2945,1478.6) 2951.2,1472.4 3014.17,1472.4 3031.57,1455 3307.69,1455 3318.59,1465.9 3399.1,1465.9 v2(3400,1465)
P1_11/I3C1_PUR: R53.1 R169.1 | length 1584
  TOP w4.4: R169.1@2915,1438.6 2936.4,1438.6 2945,1430 v2(2945,1407.06) ; R53.1@3700,920 3675,945 3645.86,945 3560,1030.86 3560,1300 3600,1340 3648.6,1340 3741.5,1432.9 v1(3750,1432.9)
  BOTTOM w4.4: v2(2945,1407.06) 2959.06,1393 3464.1,1393 3495.8,1424.7 3741.8,1424.7 v1(3750,1432.9)
P1_12/EZH_LCD_D8: J11.28 R182.3 U1.D2 | length 2681.3
  TOP w4: 2445,1145 2460.07,1129.93 2485.7,1129.93 U1.D2@2497.2,1118.43
  TOP w4.4: v1(1925,1160) 1920,1155 1920,1094.09 1936.22,1077.86 1936.22,798.78 1970,765 1970,727.5 v1(1967.5,725) ; v1(2346.86,1896) 2330,1879.14 2330,1855 2338.14,1846.86 2338.14,1598.14 2275,1535 2275,1269.1 v2(2297.5,1246.6) 2298.98,1246.6 2385.58,1160 2430,1160 2445,1145
  BOTTOM w4.4: v1(1925,1160) 1945,1180 2085.86,1180 2105.86,1200 2210.03,1200 2238.03,1228 2283.63,1228 2297.5,1241.87 v2(2297.5,1246.6) ; v1(1967.5,725) 1990,702.5 1990,685 1975,670 1975,455 1995,435 1995,305 2000,300 R182.3@2030,300 ; v1(2346.86,1896) 2393.1,1896 2415,1917.9 2415,1940 2445,1970 2615,1970 J11.28@2665,1920
P1_13/ENET_RXDV/MODE2: R75.1 R89.1 R163.1 | length 859.1
  TOP w4.4: v1(1430,805) R75.1@1430,836
  BOTTOM w4.4: v1(1430,805) R89.1@1430,836 1443.26,836 1454.26,825 1475,825 1515,865 1515,906.83 1510.6,911.23 1504.4,911.23 1500,915.63 1500,924.43 1504.4,928.83 1510.6,928.83 1515,933.23 1515,943.43 1643.37,1071.8 1832.54,1071.8 1890,1129.26 1890,1182.62 1932.38,1225 R163.1@1960,1225
P1_13/EZH_LCD_D9: J11.27 R163.2 U1.D1 | length 1559.5
  TOP w4: 2445,1129.99 2456.56,1118.43 U1.D1@2477.52,1118.43
  TOP w4.4: v1(2319.94,1835.69) 2326.4,1829.23 2326.4,1601.4 2261.2,1536.2 2261.2,1259.84 v2(2275.52,1245.52) 2290.64,1230.4 2299.41,1230.4 2299.81,1230 2300.29,1230 2385.29,1145 2429.99,1145 2445,1129.99
  BOTTOM w4.4: R163.2@2020,1225 2056.97,1225 2061.37,1229.4 2061.37,1240.6 2065.77,1245 2074.57,1245 2078.97,1240.6 2078.97,1229.4 2083.37,1225 2090,1225 2127,1262 2259.04,1262 v2(2275.52,1245.52) ; v1(2319.94,1835.69) 2418.69,1835.69 2443,1860 2595,1860 2635,1820 J11.27@2665,1820
P1_14/ENET_RXD0/MODE0: R79.1 R88.1 R164.1 | length 1095
  TOP w4.4: R79.1@1430,695 v1(1459.5,695)
  BOTTOM w4.4: R88.1@1430,695 v1(1459.5,695) 1477.7,713.2 1477.7,812.7 1527.07,862.07 1527.07,941.22 1647.66,1061.8 1841.8,1061.8 1905,1125 1905,1175 1920,1190 2080,1190 2120,1230 R164.1@2140,1230
P1_14/EZH_LCD_D10: J11.2 R164.2 U1.D4 | length 2871.3
  TOP w4: 2445,1115 2453.26,1106.74 2524.88,1106.74 U1.D4@2536.57,1118.43
  TOP w4.4: v1(2334.39,1935) 2320,1920.61 2320,1865 2301.74,1846.74 2301.74,1818.26 2316.4,1803.6 2316.4,1606.39 2247.4,1537.39 2247.4,1250 v2(2252.4,1245) 2277.4,1220 2296.15,1220 2381.15,1135 2425,1135 2445,1115
  BOTTOM w4.4: R164.2@2200,1230 2220,1230 2235,1245 v2(2252.4,1245) ; v1(2334.39,1935) 2404.39,2005 2770,2005 2797.8,1977.2 2958.91,1977.2 2996.71,2015 3870,2015 J11.2@3965,1920
P1_15/ENET_RXD1/MODE1: R80.1 R90.1 R165.1 | length 627.6
  TOP w4.4: R80.1@1430,655 v1(1459.5,655)
  BOTTOM w4.4: R90.1@1430,655 v1(1459.5,655) 1487.7,683.2 1487.7,807.7 1539.14,859.14 1539.14,939.14 1610,1010 1740,1010 R165.1@1755,1025
P1_15/EZH_LCD_D11: J11.1 R165.2 U1.E4 | length 3567.8
  TOP w4: 2445,1100 2446.26,1098.74 U1.E4@2536.57,1098.74
  TOP w4.4: v1(2298.2,1788.2) 2298.2,1608.19 2236.2,1546.19 2236.2,1213.29 v2(2248.29,1201.2) 2256.2,1201.2 2265,1210 2292.01,1210 2377.01,1125 2419.14,1125 2444.14,1100 2445,1100
  BOTTOM w4.4: R165.2@1815,1025 1879.34,1025 1942.28,1087.95 2037.95,1087.95 2130,1180 2230,1180 2248.29,1198.29 v2(2248.29,1201.2) ; v1(2298.2,1788.2) 2281.6,1804.8 2281.6,1885 2307.93,1911.33 2307.93,1934.28 2388.65,2015 2895,2015 2913.8,1996.2 2931.71,1996.2 2960.51,2025 3930,2025 4020,1935 4020,1875 J11.1@3965,1820
P1_16/EZH_LCD_D12: J11.4 J14.3 R52.1 R53.2 R55.1 U1.F6 | length 3736.9
  TOP w4: v2(2575.94,1060) U1.F6@2575.94,1079.06
  TOP w4.4: v2(2603,1412.13) 2639.14,1375.99 v2(2639.14,1319.19) ; v1(3320.74,805) 3360.4,844.66 3360.4,1256.17 3340.04,1276.53 3340.04,1434.89 v2(3354.85,1449.7) 3354.85,1449.84 3340.04,1464.64 J14.3@3340.04,1520.11 ; v1(3615,880) 3615,908 3627,920 R53.2@3660,920 R52.1@3660,885 R55.1@3660,835 ; J11.4@3865,1920 3915,1870 3915,1645 3930,1630 3930,1495 v1(4010,1415)
  BOTTOM w4: v2(2575.94,1060) 2595,1060 2609,1074 2609,1097.31 2578,1128.31 2578,1145.52 2592.48,1160 2606.31,1160 2625.09,1178.77 2625.09,1218.09
  BOTTOM w4.4: v2(2603,1412.13) 2607.96,1417.09 2793.44,1417.09 2806.35,1430 2894.39,1430 2916.79,1452.4 3005.89,1452.4 3024.38,1433.9 3339.05,1433.9 v2(3354.85,1449.7) 3358.35,1446.2 3416.2,1446.2 3431.4,1461.4 3643.6,1461.4 3665,1440 3720,1440 3731.1,1451.1 3758.9,1451.1 3782,1428 3997,1428 v1(4010,1415) ; 2625.09,1218.09 2625.09,1305.14 v2(2639.14,1319.19) ; v1(3320.74,805) 3335.74,820 3520,820 3580,880 v1(3615,880)
P1_17/EZH_LCD_D13: J11.3 J14.4 R51.1 R56.1 U1.F4 | length 3522.9
  TOP w4: 2445,1090 2525.63,1090 U1.F4@2536.57,1079.06
  TOP w4.4: v2(2220,1503.8) 2220,1200 2235,1185 2255,1185 2270,1200 2287.86,1200 2372.86,1115 2415,1115 2440,1090 2445,1090 ; R56.1@3660,775 R51.1@3615,775 3595.3,794.7 3595.3,981.41 3545,1031.71 3545,1303 3598,1356 3621,1356 3675,1410 3675,1438.2 v1(3695,1458.2) 3700,1463.2 3700,1545 3732.5,1577.5 3732.5,1687.5 J11.3@3865,1820
  BOTTOM w4.4: v2(2220,1503.8) 2223.95,1507.75 2377.25,1507.75 2400,1485 2464.62,1485 2493.69,1455.93 2553.17,1455.93 2575.57,1478.33 2752.28,1478.33 2768.75,1494.8 3010.2,1494.8 3040,1465 3303.54,1465 3314.44,1475.9 3375.9,1475.9 3420.11,1520.11 J14.4@3440.04,1520.11 3488.75,1471.4 3681.8,1471.4 v1(3695,1458.2)
P1_18/EZH_LCD_D14_CAMERA_PDOWN: J11.6 U1.G4 | length 2917
  TOP w4: v2(2536.57,1039) U1.G4@2536.57,1059.37
  TOP w4.4: v2(2135,1110) 2135,1175.86 2203.8,1244.66 2203.8,1527.93 2280,1604.13 2280,1851.74 2298.8,1870.54 v1(2299.8,1870.54)
  BOTTOM w4.4: v2(2135,1110) 2135,1094.88 2164.88,1065 2265.67,1065 2307.77,1107.1 2362.09,1107.1 2409.19,1060 2496.38,1060 2517.38,1039 v2(2536.57,1039) ; v1(2299.8,1870.54) 2299.8,1874.67 2417.12,1992 2768,1992 2792.8,1967.2 2963.06,1967.2 2995.86,2000 3715,2000 3765,1950 J11.6@3765,1920
P1_19/EZH_LCD_D15_CAMERA_RST: J11.5 U1.G5 | length 2348.9
  TOP w4: U1.G5@2556.26,1059.37 v2(2556.26,1080)
  TOP w4.4: v1(2367.3,1795) 2367.3,1592.3 2325,1550 2325,1308.43 2382.87,1250.56 v2(2382.87,1241.79)
  BOTTOM w4.4: v1(2367.3,1795) 2393.5,1768.8 3123.8,1768.8 3136,1781 3726,1781 J11.5@3765,1820 ; v2(2382.87,1241.79) 2376.8,1235.72 2376.8,1148.2 2400,1125 2503,1125 2548,1080 v2(2556.26,1080)
P1_20/ENET_MDC: R191.1 U1.K5 | length 1419.8
  TOP w4: v2(2537.2,1000.31) U1.K5@2556.26,1000.31
  TOP w4.4: R191.1@1445,930 1470,930 1500,900 1500,816.4 v1(1526.4,790)
  BOTTOM w4.4: v1(1526.4,790) 1616.4,880 1630,880 1667.5,917.5 1667.5,937.5 1719.6,989.6 2027.06,989.6 2117.46,1080 2135.74,1080 2160.74,1055 2269.82,1055 2309.82,1095 2360,1095 2404,1051 2492.66,1051 2537.2,1006.45 v2(2537.2,1000.31)
P1_21/ARD_D5: J1.7 R166.2 SJ3.1 U1.L5 | length 2264.4
  TOP w4.4: J1.7@1917.5,1820 1867.5,1870 1867.5,1944.24 1888.26,1965 1925,1965 1945,1985 2160,1985 2177.5,1967.5 2177.5,1617.5 2165,1605 2165,1545.86 2130,1510.86 2130,1220 2098.8,1188.8 2098.8,1030.2 v2(2112.09,1016.91) ; v2(2556.26,961) U1.L5@2556.26,980.63
  BOTTOM w4.4: SJ3.1@1948,864 1948,884.6 1952.4,889 1999,889 2015,905 R166.2@2015,932 2027.18,932 v2(2112.09,1016.91) 2116.02,1016.91 2134.11,1035 2280,1035 2295,1020 2295,970.55 2306.95,958.6 2426.4,958.6 2436.5,948.5 2543.5,948.5 2556,961 v2(2556.26,961)
P1_21/ENET_MDIO: R155.2 R166.1 U9.16 | length 1028.8
  TOP w4.4: U9.16@1308.01,808.95 1323.95,808.95 R155.2@1390,875 1390,890 1395,895 1474,895 1490,879 1490,780 1516.21,753.79 1691.21,753.79 v1(1710,735)
  BOTTOM w4.4: v1(1710,735) 1730,755 1730,942 1746.5,958.5 1928.5,958.5 R166.1@1955,932
P1_22/EZH_LCD_DC: J3.3 J11.24 SJ9.3 U1.L4 | length 4036.5
  TOP w4: v2(2517.37,980.63) U1.L4@2536.57,980.63
  TOP w4.4: v2(2128.8,1063.8) 2125.6,1063.8 2118.8,1070.6 2118.8,1173.8 2166.2,1221.2 2166.2,1521.2 2259,1614 2259,1892.2 v1(2281.8,1915) ; v1(2337.91,1990) 2667,1990 2714,1943 2714,1894 2730,1878 2823,1878 J11.24@2865,1920
  BOTTOM w4.4: J3.3@915.5,120.5 916.5,121.5 SJ9.3@916.5,255 916.5,271.5 949,304 1205.1,304 1278,376.9 1278,453 1308.2,483.2 1520.33,483.2 1566.62,529.5 1566.62,694.63 1710,838 1710,950.86 1737.64,978.5 2030.11,978.5 2115.41,1063.8 v2(2128.8,1063.8) 2137.8,1063.8 2156.6,1045 2273.96,1045 2313.96,1085 2355,1085 2398,1042 2488.93,1042 2517.37,1013.56 v2(2517.37,980.63) ; v1(2281.8,1915) 2281.8,1933.89 v1(2337.91,1990)
P1_23/ARD_D3: J11.23 SJ1.1 U1.M4 | length 2286.4
  TOP w4: 2445.27,940.27 2515.9,940.27 U1.M4@2536.57,960.94
  TOP w4.4: v2(2140.2,1774.8) 2140.2,1774.2 2105,1739 2105,1553 2095,1543 2095,1237.86 2064.42,1207.28 2064.42,999.58 2104.2,959.8 v2(2104.2,959.28) 2104.2,940.8 2140,905 2410,905 2445.27,940.27
  BOTTOM w4.4: v2(2104.2,959.28) 2104.2,963 2129.2,988 2167,988 2176.83,978.17 2220.6,978.17 2225,982.57 SJ1.1@2225,1001 ; v2(2140.2,1774.8) 2145,1770 2310,1770 2355,1815 2380,1815 2413.2,1781.8 2781.8,1781.8 2820,1820 J11.23@2865,1820
P2_0/EZH_LCD_WR: J11.25 R167.1 | length 785.5
  TOP w4.4: J11.25@2765,1820 2765,1700 2775,1690 2775,1478.13 v2(2771.4,1474.53)
  BOTTOM w4.4: R167.1@2365,1485 2375,1475 2460.48,1475 2489.55,1445.93 2557.32,1445.93 2579.72,1468.33 2765.2,1468.33 v2(2771.4,1474.53)
P2_0/TRIG_IN5-MC_ENC_B: J3.1 R167.2 SJ8.3 U1.H2 | length 3045.5
  TOP w4: 2445,1047.69 2447.7,1050.39 2486.5,1050.39 U1.H2@2497.2,1039.69
  TOP w4.4: v2(2150,1490.88) 2150,1219.14 2108.8,1177.94 2108.8,1054.2 v2(2119.6,1043.4) 2121.22,1045.02 2442.33,1045.02 2445,1047.69
  BOTTOM w4.4: J3.1@815.5,120.5 866,70 1035,70 1065,100 1065,178.5 SJ8.3@1135.5,249 1135.5,270.5 1145,280 1220,280 1297,357 1297,445 1321.8,469.8 1525.97,469.8 1578.11,521.94 1578.11,688.11 1720,830 1720,946.71 1741.79,968.5 2034.25,968.5 2109.15,1043.4 v2(2119.6,1043.4) ; v2(2150,1490.88) 2155.88,1485 2260,1485 2272.15,1497.15 2312.85,1497.15 R167.2@2325,1485
P2_1/SDHC0_CD_B: J7.9 R57.2 TP27.1 U1.H1 | length 3429.3
  TOP w4: 2445,1035.01 2449.68,1039.69 U1.H1@2477.52,1039.69
  TOP w4.4: v2(2141.69,954.32) 2143.8,956.43 2143.8,977.61 2201.19,1035 2444.99,1035 ; R57.2@4015,490 TP27.1@4015,425 4047.58,425 v1(4048.58,426)
  BOTTOM w4.4: v2(2141.69,954.32) 2130.1,942.73 2130.1,755.67 2152,733.77 2152,356 2168.93,339.07 2168.93,288.35 2308.96,148.33 2368.33,148.33 2381,161 2983.21,161 2988.61,155.6 2988.61,126.4 2993.01,122 3001.81,122 3006.21,126.4 3006.21,155.6 3010.61,160 3019.41,160 3023.81,155.6 3023.81,126.4 3028.21,122 3037.01,122 3041.41,126.4 3041.41,155.6 3045.81,160 3091,160 3146,215 3479.26,215 3639.26,375 3997.58,375 v1(4048.58,426) J7.9@4048.58,500.94
P2_2/CAMERA_CLKIN: J11.16 R168.1 | length 1031.7
  BOTTOM w4.4: J11.16@3265,1920 3310,1965 3493,1965 3515,1943 3515,1893.4 3533.4,1875 3795,1875 3816,1854 3816,1799 3852,1763 4021,1763 4055,1729 R168.1@4055,1665
P2_2/PWM1_A2: J3.7 J7.8 R168.2 SJ7.3 TP5.1 U1.H3 | length 7590.3
  TOP w4: 2445,1025 2450,1025 2453.99,1028.99 2506.19,1028.99 U1.H3@2516.89,1039.69
  TOP w4.4: J3.7@1115.5,120.5 1115.5,119.5 1170,65 1170,-15 1226,-71 2294,-71 2335,-30 v1(2335,110) ; v1(2144.45,1638.4) 2144.45,1559.45 2110,1525 2110,1238.71 2074.42,1203.14 2074.42,1011.97 2124,962.39 2124,948 2134,938 2148.28,938 2160,949.72 v2(2160,970.52) 2160,979.67 2205.34,1025 2445,1025 ; v1(3510,220) 3665,375 3890,375 TP5.1@3940,425 v1(3975,425) ; v1(4057,665) 4057,729 4175.2,847.2 4175.2,1329.8 4120,1385 4120,1610 v1(4155,1645)
  BOTTOM w4.4: SJ7.3@1523.5,1620 1560,1620 1565,1625 1758,1625 1798,1665 2005,1665 2031.6,1638.4 v1(2144.45,1638.4) ; v2(2160,970.52) 2134.63,970.52 2120.1,955.99 2120.1,751.52 2142,729.62 2142,348 2158.93,331.07 2158.93,284.21 2333.14,110 v1(2335,110) 2370,75 3022.86,75 3152.86,205 3495,205 v1(3510,220) ; v1(3975,425) 4005.28,455.28 J7.8@4005.28,500.94 4005.28,535.6 4009.68,540 4075,540 4090,555 4090,639 4064,665 v1(4057,665) ; R168.2@4115,1665 4135,1665 v1(4155,1645)
P2_3/PWM1_B2: J3.5 J7.7 SJ4.3 TP4.1 U1.J3 | length 5945.2
  TOP w4: 2445,1015 2454.99,1015 2459.99,1020 U1.J3@2516.89,1020
  TOP w4.4: J3.5@1015.5,120.5 1065,71 1065,-10 1136,-81 2319,-81 2355,-45 2355,177.53 v1(2356.07,178.6) ; v2(2180.28,960.97) 2234.3,1015 2445,1015 ; TP4.1@3865,425 v1(3905,425) ; v1(4023,665) 4023,713 4150,840 4150,1087 v1(4147,1090)
  BOTTOM w4.4: v2(2180.28,960.97) 2165.2,945.9 2165.2,917.6 2150.1,902.5 2150.1,763.95 2188.93,725.12 2188.93,708.05 2184.53,703.65 2178.4,703.65 2174,699.25 2174,690.45 2178.4,686.05 2184.53,686.05 2188.93,681.65 2188.93,672.85 2184.53,668.45 2178.4,668.45 2174,664.05 2174,655.25 2178.4,650.85 2184.53,650.85 2188.93,646.45 2188.93,637.65 2184.53,633.25 2178.4,633.25 2174,628.85 2174,620.05 2178.4,615.65 2184.53,615.65 2188.93,611.25 2188.93,602.45 2184.53,598.05 2178.4,598.05 2174,593.65 2174,584.85 2178.4,580.45 2184.53,580.45 2188.93,576.05 2188.93,567.25 2184.53,562.85 2178.4,562.85 2174,558.45 2174,549.65 2178.4,545.25 2184.53,545.25 2188.93,540.85 2188.93,532.05 2184.53,527.65 2178.4,527.65 2174,523.25 2174,514.45 2178.4,510.05 2184.53,510.05 2188.93,505.65 2188.93,496.85 2184.53,492.45 2178.4,492.45 2174,488.05 2174,479.25 2178.4,474.85 2184.53,474.85 2188.93,470.45 2188.93,461.65 2184.53,457.25 2178.4,457.25 2174,452.85 2174,444.05 2178.4,439.65 2184.53,439.65 2188.93,435.25 2188.93,426.45 2184.53,422.05 2178.4,422.05 2174,417.65 2174,408.85 2178.4,404.45 2184.53,404.45 2188.93,400.05 2188.93,391.25 2184.53,386.85 2178.4,386.85 2174,382.45 2174,373.65 2178.4,369.25 2184.53,369.25 2188.93,364.85 2188.93,296.64 2306.97,178.6 v1(2356.07,178.6) 2357.47,180 3080,180 3135,235 3361.81,235 3378.21,251.4 3501.52,251.4 3635.12,385 3857.62,385 3862.02,389.4 3862.02,434.6 3866.42,439 3875.22,439 3879.62,434.6 3879.62,389.4 3884.02,385 3900.6,385 3905,389.4 v1(3905,425) 3910,425 3961.97,476.97 J7.7@3961.97,500.94 3961.97,538.97 3973,550 4070.86,550 4080,559.14 4080,630 4063.2,646.8 4041.2,646.8 v1(4023,665) ; SJ4.3@4075,1091.5 4145.5,1091.5 v1(4147,1090)
P2_4/PWM1_A1: J3.11 J7.5 SJ5.3 TP26.1 U1.K3 | length 6266.2
  TOP w4: 2445,1005 2459.99,1005 2466,1011.01 2506.19,1011.01 2509.1,1008.1 U1.K3@2516.89,1000.31
  TOP w4.4: J3.11@1315.5,120.5 1360,76 1360,5 1416,-51 2284,-51 2305,-30 2305,189.26 v1(2330.74,215) ; v2(2205,961.36) 2248.64,1005 2445,1005 ; TP26.1@3790,425 3828,425 v1(3830,427) ; v1(3985,665) 3985,695 4135,845 4135,1065 4128.8,1071.2 4128.8,1188.8 4140,1200 4140,1265 4075,1330 4075,1570.54 v1(4012.34,1633.2)
  BOTTOM w4.4: v2(2205,961.36) 2197.6,953.96 2197.6,921.71 2170.1,894.21 2170.1,772.24 2208.93,733.41 2208.93,695.34 2213.33,690.94 2242.6,690.94 2247,686.54 2247,677.74 2242.6,673.34 2213.33,673.34 2208.93,668.94 2208.93,660.14 2213.33,655.74 2242.6,655.74 2247,651.34 2247,642.54 2242.6,638.14 2213.33,638.14 2208.93,633.74 2208.93,624.94 2213.33,620.54 2242.6,620.54 2247,616.14 2247,607.34 2242.6,602.94 2213.33,602.94 2208.93,598.54 2208.93,589.74 2213.33,585.34 2242.6,585.34 2247,580.94 2247,572.14 2242.6,567.74 2213.33,567.74 2208.93,563.34 2208.93,554.54 2213.33,550.14 2242.6,550.14 2247,545.74 2247,536.94 2242.6,532.54 2213.33,532.54 2208.93,528.14 2208.93,519.34 2213.33,514.94 2242.6,514.94 2247,510.54 2247,501.74 2242.6,497.34 2213.33,497.34 2208.93,492.94 2208.93,484.14 2213.33,479.74 2242.6,479.74 2247,475.34 2247,466.54 2242.6,462.14 2213.33,462.14 2208.93,457.74 2208.93,304.93 2298.86,215 v1(2330.74,215) 2364.14,215 2379.14,200 3068.89,200 3125.89,257 3354.11,257 3370.11,273 3445.8,273 3461,288.2 3524.17,288.2 3632.97,397 3800,397 v1(3830,427) 3875.35,472.35 J7.5@3875.35,500.94 3875.35,530.35 3885,540 3920,540 3940,560 4060,560 4070,570 4070,625 4061,634 4016,634 v1(3985,665) ; SJ5.3@4003.5,1665 4003.5,1642.04 v1(4012.34,1633.2)
P2_5/PWM1_B1: J3.9 J7.3 SJ6.3 TP25.1 U1.K1 | length 6871.5
  TOP w4: 2445,995 2446.63,996.63 2473.84,996.63 U1.K1@2477.52,1000.31
  TOP w4.4: J3.9@1215.5,120.5 1265,71 1265,-5 1321,-61 2288.14,-61 2315,-34.14 2315,163.27 2387.93,236.2 v2(2395,236.2) ; v1(1561.6,1485.6) 1561.6,1450.08 1525,1413.48 1525,1310 1510,1295 1510,832.14 1577.14,765 1690,765 v1(1710,785) ; v2(2230,961) 2264,995 2445,995 ; TP25.1@3710,425 v1(3745,425)
  BOTTOM w4.4: J3.9@1215.5,120.5 1215.5,121.5 1315,221 1315,438 1333.4,456.4 1531.62,456.4 1589.6,514.38 1589.6,674.2 1700.4,785 v1(1710,785) ; SJ6.3@1478.5,1500 1478.5,1499.5 1494.59,1483.41 1512.89,1483.41 1524.47,1495 1552.2,1495 v1(1561.6,1485.6) ; v2(2230,961) 2230,899.14 2212.5,881.64 2212.5,772.27 2302.86,681.91 2302.86,675.69 2293.19,666.03 2293.19,658.81 2298.92,653.08 2305.14,653.08 2315.3,663.25 2321.52,663.25 2331.39,653.38 2331.39,640.53 2326.99,636.13 2298.4,636.13 2294,631.73 2294,622.93 2298.4,618.53 2326.99,618.53 2331.39,614.13 2331.39,605.33 2326.99,600.93 2298.4,600.93 2294,596.53 2294,587.73 2298.4,583.33 2326.99,583.33 2331.39,578.93 2331.39,570.13 2326.99,565.73 2298.4,565.73 2294,561.33 2294,552.53 2298.4,548.13 2326.99,548.13 2331.39,543.73 2331.39,533.73 2326.99,529.33 2299.4,529.33 2295,524.93 2295,285 2325,255 2376.2,255 v2(2395,236.2) 2401.2,230 3052.22,230 3112.22,290 3341.85,290 3368.66,316.81 3374.89,316.81 3385.24,306.46 3391.46,306.46 3397.68,312.68 3397.68,318.91 3384,332.59 3384,358.64 3388.4,363.04 3411.15,363.04 3415.55,358.64 3415.55,311.4 3419.95,307 3428.75,307 3433.15,311.4 3433.15,340.6 3437.55,345 3447.89,345 3452.29,340.6 3452.29,337.4 3456.69,333 3465.49,333 3469.89,337.4 3469.89,340.6 3474.29,345 3536,345 3547.39,333.61 3553.61,333.61 3565.42,345.42 3565.42,351.64 3557.14,359.92 3557.14,366.15 3563.37,372.37 3569.59,372.37 3577.87,364.09 3584.09,364.09 3590.32,370.31 3590.32,376.54 3582.04,384.82 3582.04,391.04 3588.26,397.26 3594.48,397.26 3602.76,388.98 3608.98,388.98 3615.21,395.21 3615.21,401.43 3606.93,409.71 3606.93,415.93 3613,422 3623.12,422 3627.52,417.6 3627.52,413.4 3631.92,409 3640.72,409 3645.12,413.4 3645.12,417.6 3649.52,422 3658.32,422 3662.72,417.6 3662.72,413.4 3667.12,409 3675.92,409 3680.32,413.4 3680.32,417.6 3684.72,422 3693.52,422 3697.92,417.6 3697.92,413.4 3702.32,409 3711.12,409 3715.52,413.4 3715.52,417.6 3719.92,422 3742,422 v1(3745,425) 3759,411 3784.34,411 3788.74,415.4 3788.74,435.8 3784.34,440.2 3763.4,440.2 3759,444.6 3759,453.4 3763.4,457.8 3784.34,457.8 3788.74,462.2 J7.3@3788.74,500.94
P2_6/PWM1_A0: J3.15 J7.2 R54.1 SJ1.3 TP24.1 U1.K2 | length 4731.5
  TOP w4: 2445,986 2450,986 2452.63,988.63 2485.52,988.63 U1.K2@2497.2,1000.31
  TOP w4.4: J3.15@1515.5,120.5 1516.36,120.5 1667.86,-31 2275.71,-31 2285,-21.71 2285,210 2320,245 2365,245 2382.4,262.4 2408.45,262.4 2419.05,251.8 v2(2480,251.8) ; v2(2253.78,960.79) 2262.99,970 2293.08,970 2306.08,957 2382,957 2411,986 2445,986 ; TP24.1@3635,425 v1(3635,460) R54.1@3635,490
  BOTTOM w4.4: SJ1.3@2263.5,1001 2263.5,970.51 v2(2253.78,960.79) 2245,952.01 2245,900 2222.5,877.5 2222.5,776.41 2344.46,654.45 2344.46,519.46 2310,485 2310,290 2330,270 2385,270 2403.2,251.8 v2(2480,251.8) 2480,250 2490,240 3046.66,240 3107.66,301 3337.3,301 3367,330.7 3367,372.27 3371.4,376.67 3406.6,376.67 3411,381.07 3411,389.87 3406.6,394.27 3371.4,394.27 3367,398.67 3367,407.47 3371.4,411.87 3406.6,411.87 3411,416.27 3411,425.07 3406.6,429.47 3371.4,429.47 3367,433.87 3367,442.67 3371.4,447.07 3406.6,447.07 3411,451.47 3411,460.27 3406.6,464.67 3371.4,464.67 3367,469.07 3367,478.6 3371.4,483 3427.6,483 3432,478.6 3432,364.4 3436.4,360 3535,360 3551.92,376.92 3551.92,383.14 3521.64,413.42 3521.64,419.64 3527.86,425.86 3534.08,425.86 3564.36,395.58 3570.58,395.58 3576.81,401.81 3576.81,408.03 3551.53,433.31 3551.53,439.53 3557.75,445.75 3563.98,445.75 3589.25,420.48 3595.48,420.48 v1(3635,460) 3652.76,460 3657.16,464.4 3657.16,473.6 3661.56,478 3670.36,478 3674.76,473.6 3674.76,464.4 3679.16,460 3691.56,460 3695.96,455.6 3695.96,438.4 3700.36,434 3709.16,434 3713.56,438.4 3713.56,455.6 3717.96,460 3741.03,460 3745.43,464.4 J7.2@3745.43,500.94